# Altium PCB AudioAmplifier.PcbDoc
Units mil, origin at the board's own origin, x right, y up, seen from the top; angles counter-clockwise.
Board outline 6000 x 4000 mil, 2 copper layers (Top Layer, Bottom Layer); 12 components, 12 nets, 35 pads, 0 vias.
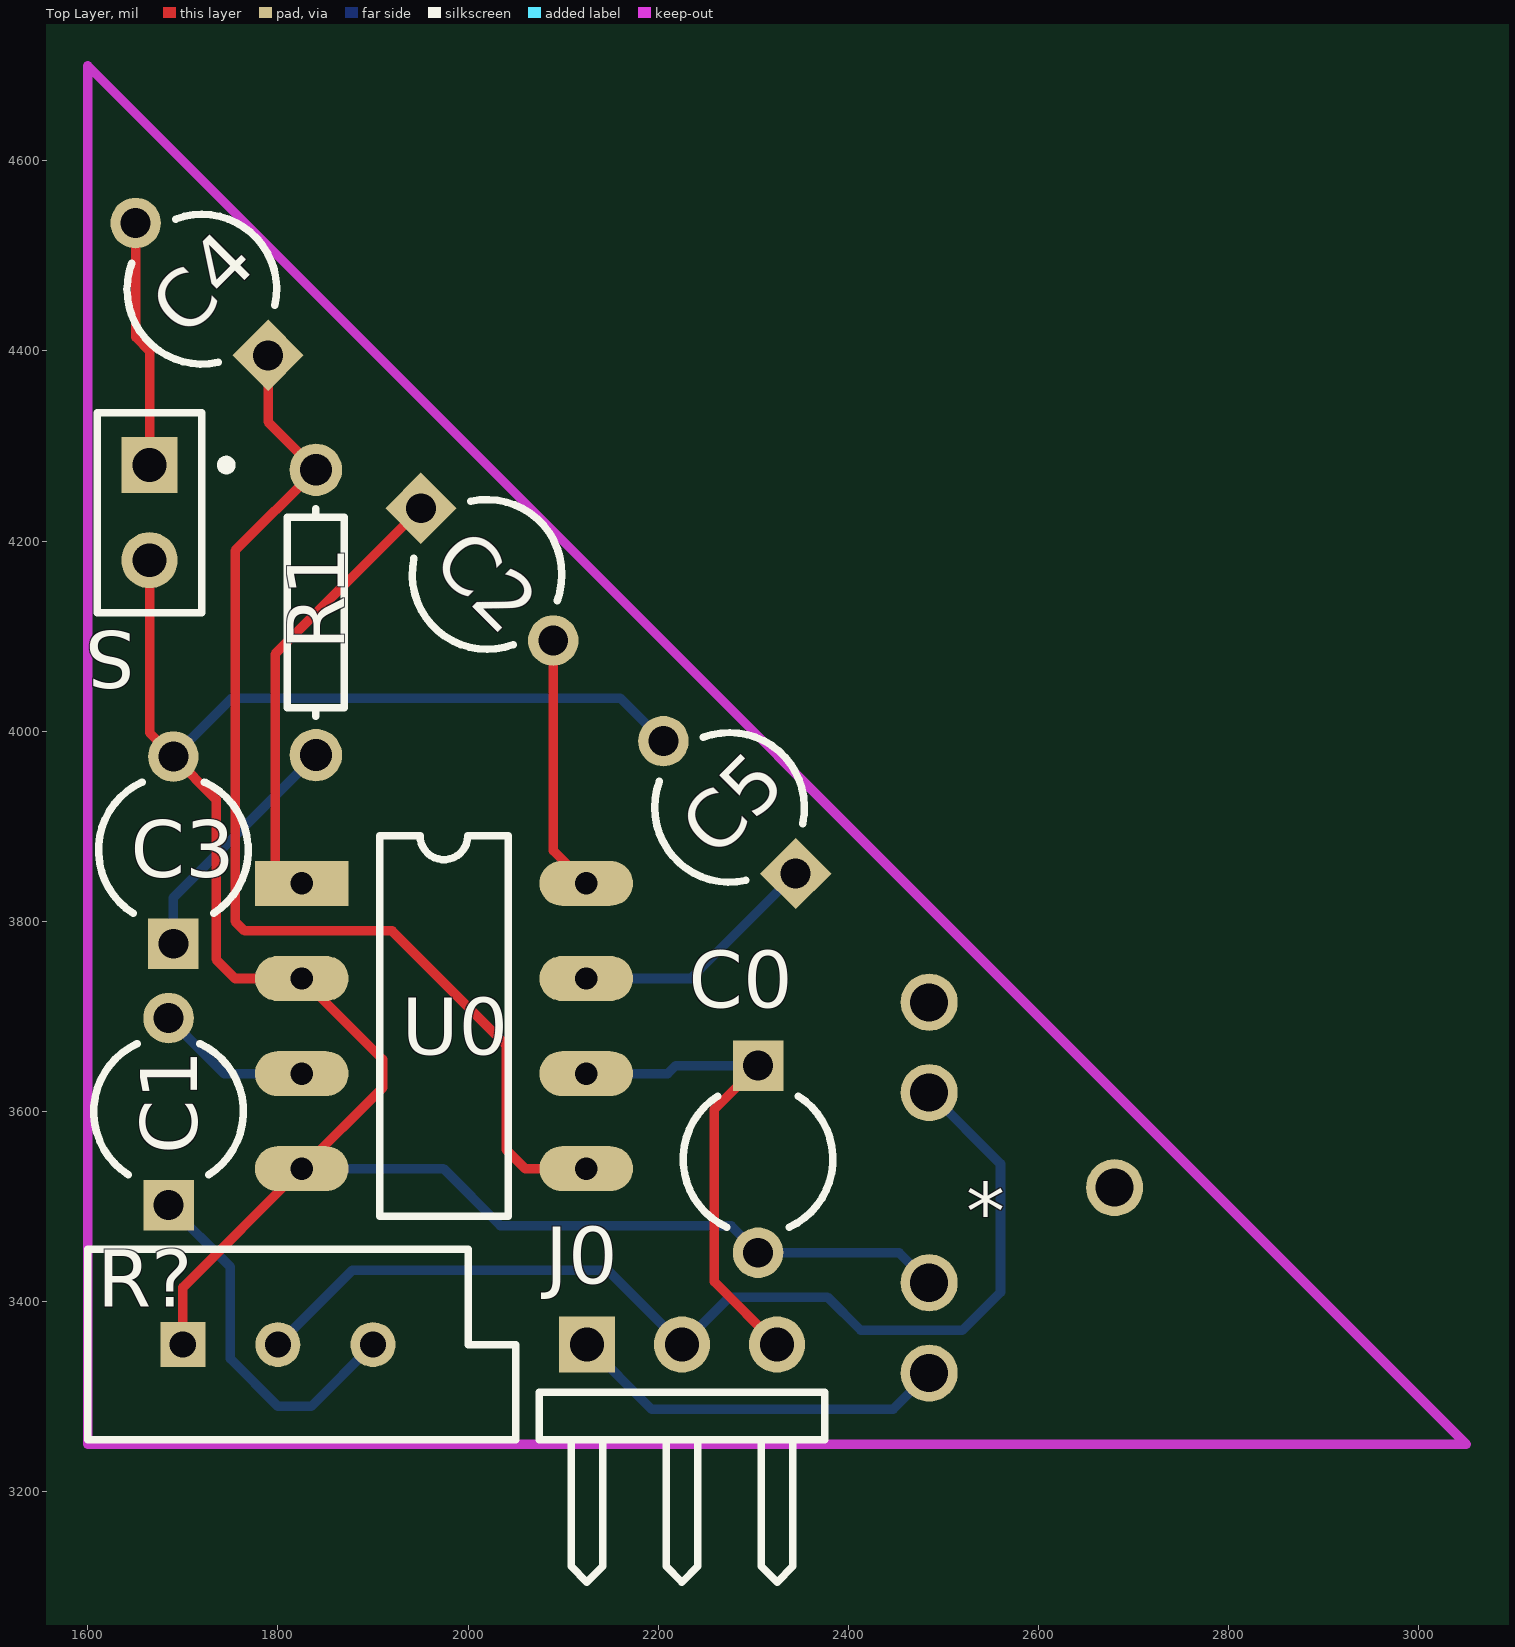
[diagram p0: Top Layer view]
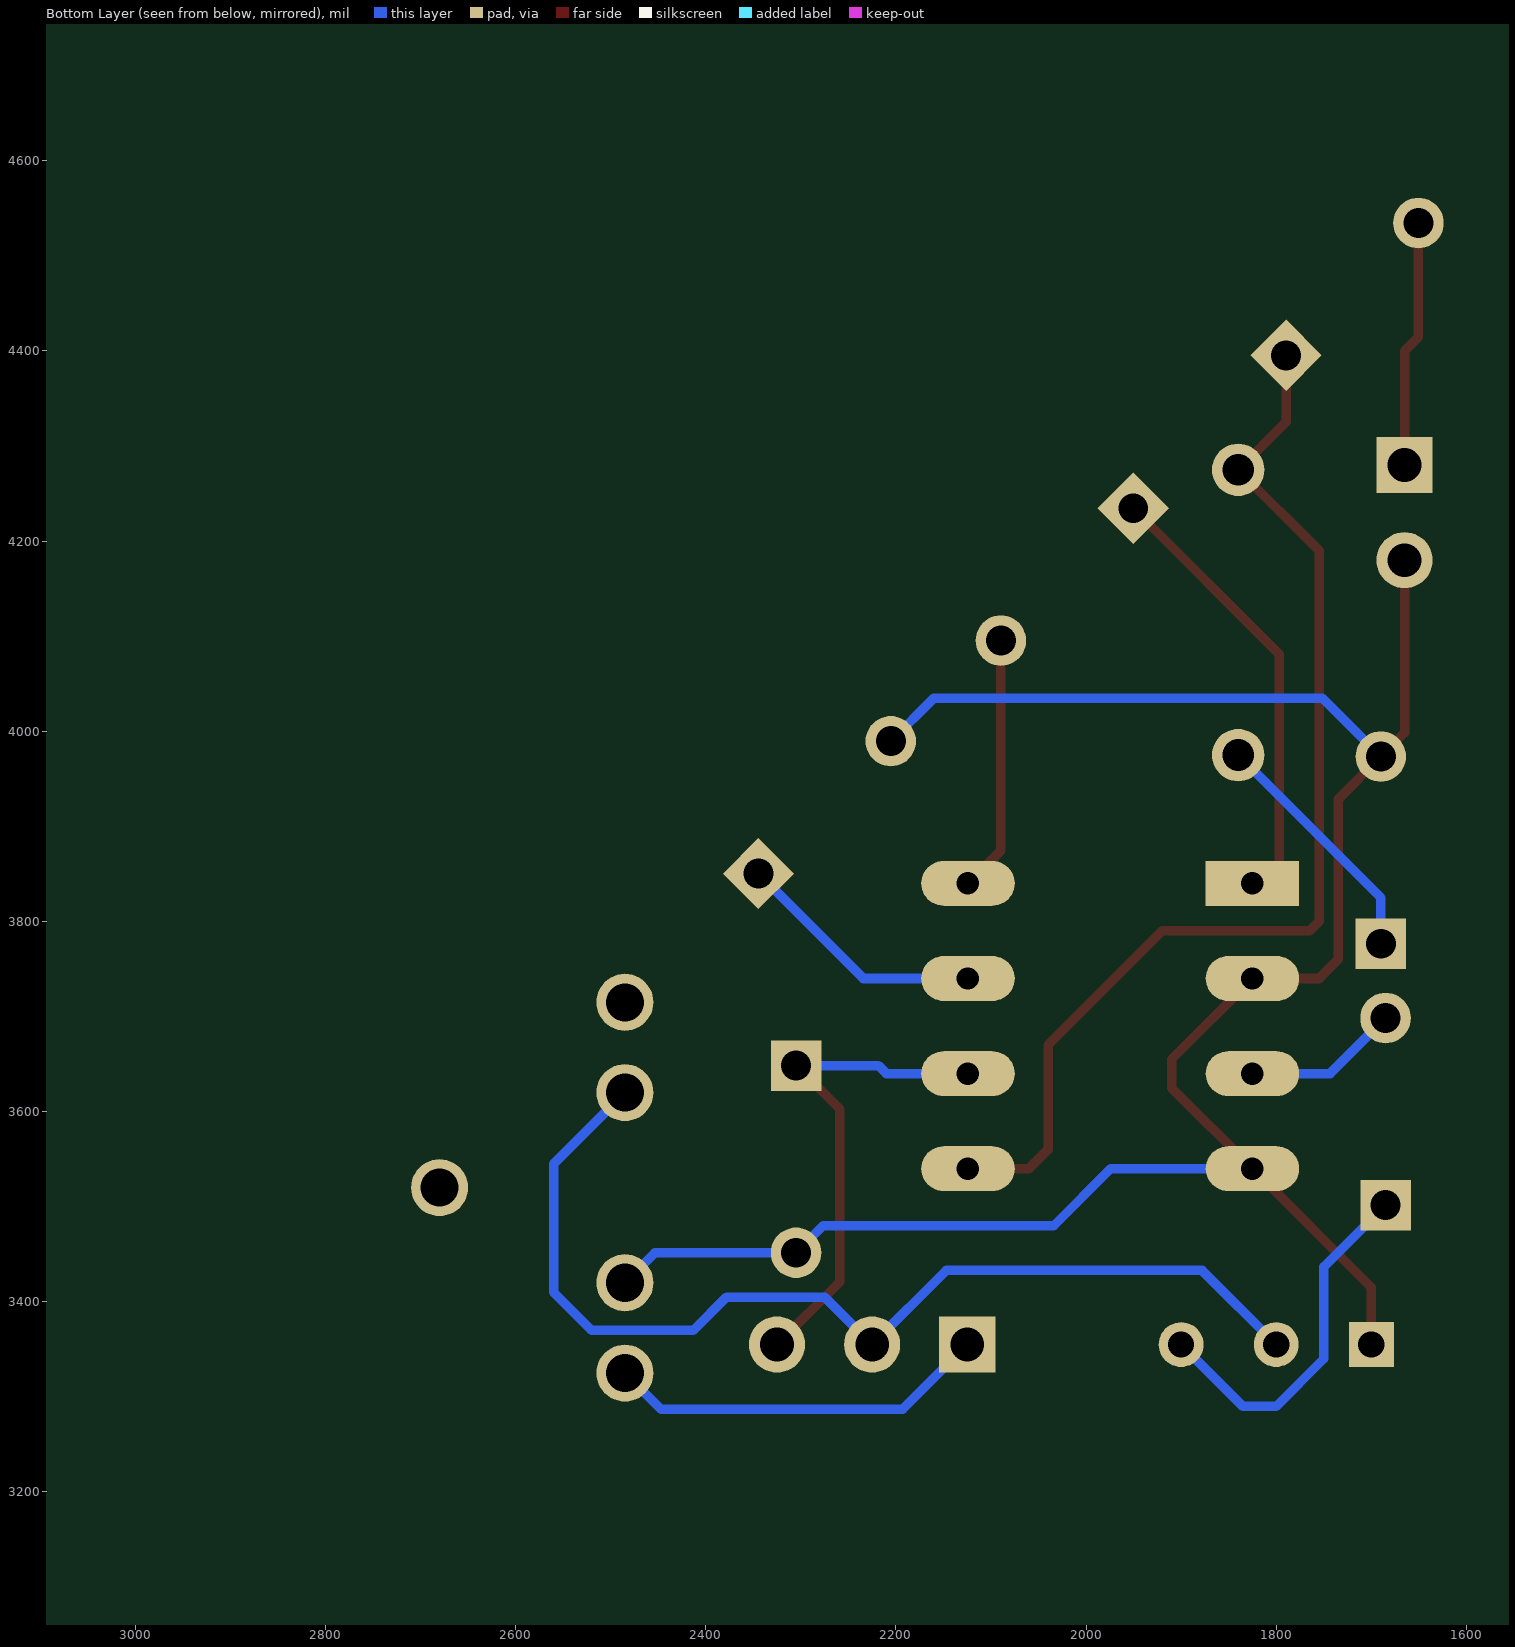
[diagram p1: Bottom Layer view, seen from below]

## Layer stack, top to bottom
Top Solder: solder mask 0.4, Solder Resist, Dk 3.5
Top Layer: signal copper 1.4
Dielectric 1: dielectric 12.6, FR-4, Dk 4.8
Bottom Layer: signal copper 1.4
Bottom Solder: solder mask 0.4, Solder Resist, Dk 3.5

## Board outline
1000,1000 7000,1000 7000,5000 1000,5000

## Design rules (kind name [scope] priority, off if disabled: settings)
Clearance [All] p1: gap=10 ignorepadtopadclearanceinfootprint=FALSE except(0: Arc-Hole Track-Hole SMDPad-Hole THPad-Hole Via-Hole Fill-Hole Poly-Hole Region-Hole Text-Hole)
PolygonConnect [All] p1: connectstyle=Relief reliefconductorwidth=10 reliefentries=4 polygonreliefangle="90 Angle" airgapwidth=10
RoutingVias [All] p1: holewidth=28 width=50 viastyle="Through Hole" minholewidth=28 minwidth=50 maxholewidth=28 maxwidth=50
SolderMaskExpansion [All] p1: expansion=4
Width [All] p1: maxlimit=10 minlimit=10 preferedwidth=10
30 further rules are at their usual default settings.

## Components (designator, comment, footprint, x,y, rotation, side; value= is the part's Value field where it differs from the comment)
* "AudioJack" AudioJack_3.5mm 2680,3520 r180 top
C0 "Cap2" CAPR5-4X5 2305,3550 r270 top value=100uF
C1 "Cap2" CAPR5-4X5 1685,3600 r90 top value=1uF
C2 "Cap2" CAPR5-4X5 2020,4165 r315 top value=10uF
C3 "Cap2" CAPR5-4X5 1690,3875 r90 top value=47uF
C4 "Cap2" CAPR5-4X5 1720,4465 r135 top value=220uF
C5 "Cap2" CAPR5-4X5 2275,3920 r135 top value=100uF
J0 "Header 3H" HDR1X3H 2125,3355 r0 top
R1 "Res1" AXIAL-0.3 1840,4125 r90 top value=10
R? "RP" VR5 1800,3355 r0 top value=10K
S "Speaker" PIN2 1665,4280 r270 top
U0 "LM386" DIP8 1825,3840 r0 top

## Footprints (in the part's own frame and the unit in brackets; to place one, negate y for a bottom-side part, rotate by r counter-clockwise, add the part's x,y. Pads: shape width x height; smd on the part's side, far side on the other; paste and mask are expansions set on the pad)
AudioJack_3.5mm [mil]
  round 60 hole 40: 1(0,0) 2(195,195) 3(195,100) 4(195,-100) 5(195,-195)
AXIAL-0.3 [mm] "Axial Device, Thru-Hole; 2 Leads; 0.3 in Pin Spacing"
  round 1.4 hole 0.85: 1(-3.81,0) 2(3.81,0)
  silkscreen extent -2.77,-0.76 2.77,0.76
CAPR5-4X5 [mm] "Capacitor; 2 Leads"
  rect 1.35x1.35 hole 0.8: 1(-2.5,0)
  round 1.35 hole 0.8: 2(2.5,0)
  silkscreen extent -1.69,-2 1.82,2
DIP8 [mm]
  rect 2.5x1.2 hole 0.6: 1(0,0)
  oval 2.5x1.2 hole 0.6: 2(0,-2.54) 3(0,-5.08) 4(0,-7.62) 5(7.6,-7.62) 6(7.6,-5.08) 7(7.6,-2.54) 8(7.6,0)
  silkscreen extent 2.08,-8.89 5.52,1.27, body extent -0.12,-9.14 7.75,1.78, height 5.08
HDR1X3H [mm] "Connector; Header; 3 Position; Right Angle"
  rect 1.5x1.5 hole 0.9: 1(0,0)
  round 1.5 hole 0.9: 2(2.54,0) 3(5.08,0)
  silkscreen extent -1.27,-6.35 6.35,-1.27
PIN2 [mm] "Photosensitive Diode; 2 Leads"
  rect 1.5x1.5 hole 0.9: 1(0,0)
  round 1.5 hole 0.9: 2(2.54,0)
  silkscreen extent -1.4,-1.4 3.94,2.18
VR5 [mm] "Thru-Hole; 3 Leads"
  rect 1.2x1.2 hole 0.7: 1(-2.54,0)
  round 1.2 hole 0.7: 2(0,0) 3(2.54,0)
  silkscreen extent -5.08,-2.54 6.35,2.54

## Part data
*: library part AudioJack_3.5mm
C0 C1 C2 C3 C4 C5: "Capacitor", PackageDescription="Capacitor; 2 Leads", PackageReference=CAPR5-4X5, Published=23-Sep-2002, Publisher="Altium Limited"
J0: "Header, 3-Pin, Right Angle", LatestRevisionDate=17-Jul-2002, LatestRevisionNote="Re-released for DXP Platform.", Publisher="Altium Limited"
R1: "Resistor", LatestRevisionDate=17-Jul-2002, LatestRevisionNote="Re-released for DXP Platform.", PackageDescription="Axial Device, Thru-Hole; 2 Leads; 0.3 in Pin Spacing", PackageReference=AXIAL-0.3, Published=8-Jun-2000, Publisher="Altium Limited"
R?: library part RPot, "Potentiometer", LatestRevisionDate=17-Jul-2002, LatestRevisionNote="Re-released for DXP Platform.", PackageDescription="Variable Resistor, Thru-Hole; 3 Leads", PackageReference=VR5, Published=8-Jun-2000, Publisher="Altium Limited", Set Position=0.5, Sim Note="Enter the Resistance value and the set point into parameter fields."
S: "Loudspeaker", LatestRevisionDate=17-Jul-2002, LatestRevisionNote="Re-released for DXP Platform.", PackageReference=PIN2, Published=24-Mar-1999, Publisher="Altium Limited"

## Nets (pads, with @x,y where several pads share a name; then routed paths per layer and width w, separated by ;. In a path a pad name is that pad's centre, name@x,y a point inside that pad or via, vN(x,y) a via of type N, cw(c..) or ccw(c..) an arc to the next point about the centre after c; other vN are vias at no path point)
Net*_2: *.2 J0.1 | length 403.9
  Bottom Layer w10: J0.1 2193,3287 2447,3287 *.2
Net*_3: *.3 C0.2 C3.2 C5.2 R?.1 S.2 U0.2 U0.4 | length 2323.9
  Top Layer w10: S.2 1665,3998.43 C3.2 1735,3928.43 1735,3760 1755,3740 U0.2 1910,3655 1910,3625 U0.4 1700,3415 R?.1
  Bottom Layer w10: C3.2 1751.57,4035 2160,4035 C5.2 ; U0.4 1974,3540 2034,3480 2276.57,3480 C0.2 2453.43,3451.57 *.3
Net*_4: *.4 J0.2 R?.2 | length 1117.5
  Bottom Layer w10: R?.2 1878,3433 2147,3433 J0.2 2275,3405 2378,3405 2413,3370 2520,3370 2560,3410 2560,3545 *.4
NetC0_1: C0.1 J0.3 U0.6 | length 524.1
  Top Layer w10: C0.1 2259,3602.43 2259,3421 J0.3
  Bottom Layer w10: U0.6 2210,3640 2218.43,3648.43 C0.1
NetC1_1: C1.1 R?.3 | length 386.1
  Bottom Layer w10: C1.1 1750,3436.57 1750,3340 1800,3290 1835,3290 R?.3
NetC1_2: C1.2 U0.3 | length 164.2
  Bottom Layer w10: C1.2 1743.43,3640 U0.3
NetC2_1: C2.1 U0.1 | length 486.1
  Top Layer w10: U0.1 1797,3840 1797,4081.19 C2.1
NetC2_2: C2.2 U0.8 | length 269.7
  Top Layer w10: C2.2 2089.6,3874.61 U0.8
NetC3_1: C3.1 R1.1 | length 260.6
  Bottom Layer w10: C3.1 1690,3825 R1.1
NetC4_1: C4.1 R1.2 U0.5 | length 1192.8
  Top Layer w10: C4.1 1789.6,4325.4 R1.2 1755,4190 1755,3800 1765,3790 1920,3790 2040,3670 2040,3560 2060,3540 U0.5
NetC4_2: C4.2 S.1 | length 260.6
  Top Layer w10: C4.2 1650.4,4414.6 1665,4400 S.1
NetC5_1: C5.1 U0.7 | length 266.1
  Bottom Layer w10: U0.7 2234.2,3740 C5.1
pads on no net: *.1 *.5

## Keep-outs
Top Layer:
  lines w10: 1600,3250 3050,3250 1600,4700 1600,3250